# Altium PCB eTag.PcbDoc
Units mm, origin at the board's own origin, x right, y up, seen from the top; angles counter-clockwise.
Board outline 152.4 x 101.6 mm, 2 copper layers (Top Layer, Bottom Layer); 68 components, 72 nets, 192 pads, 5 vias.
Unrouted connection lines stored in the file: 122.
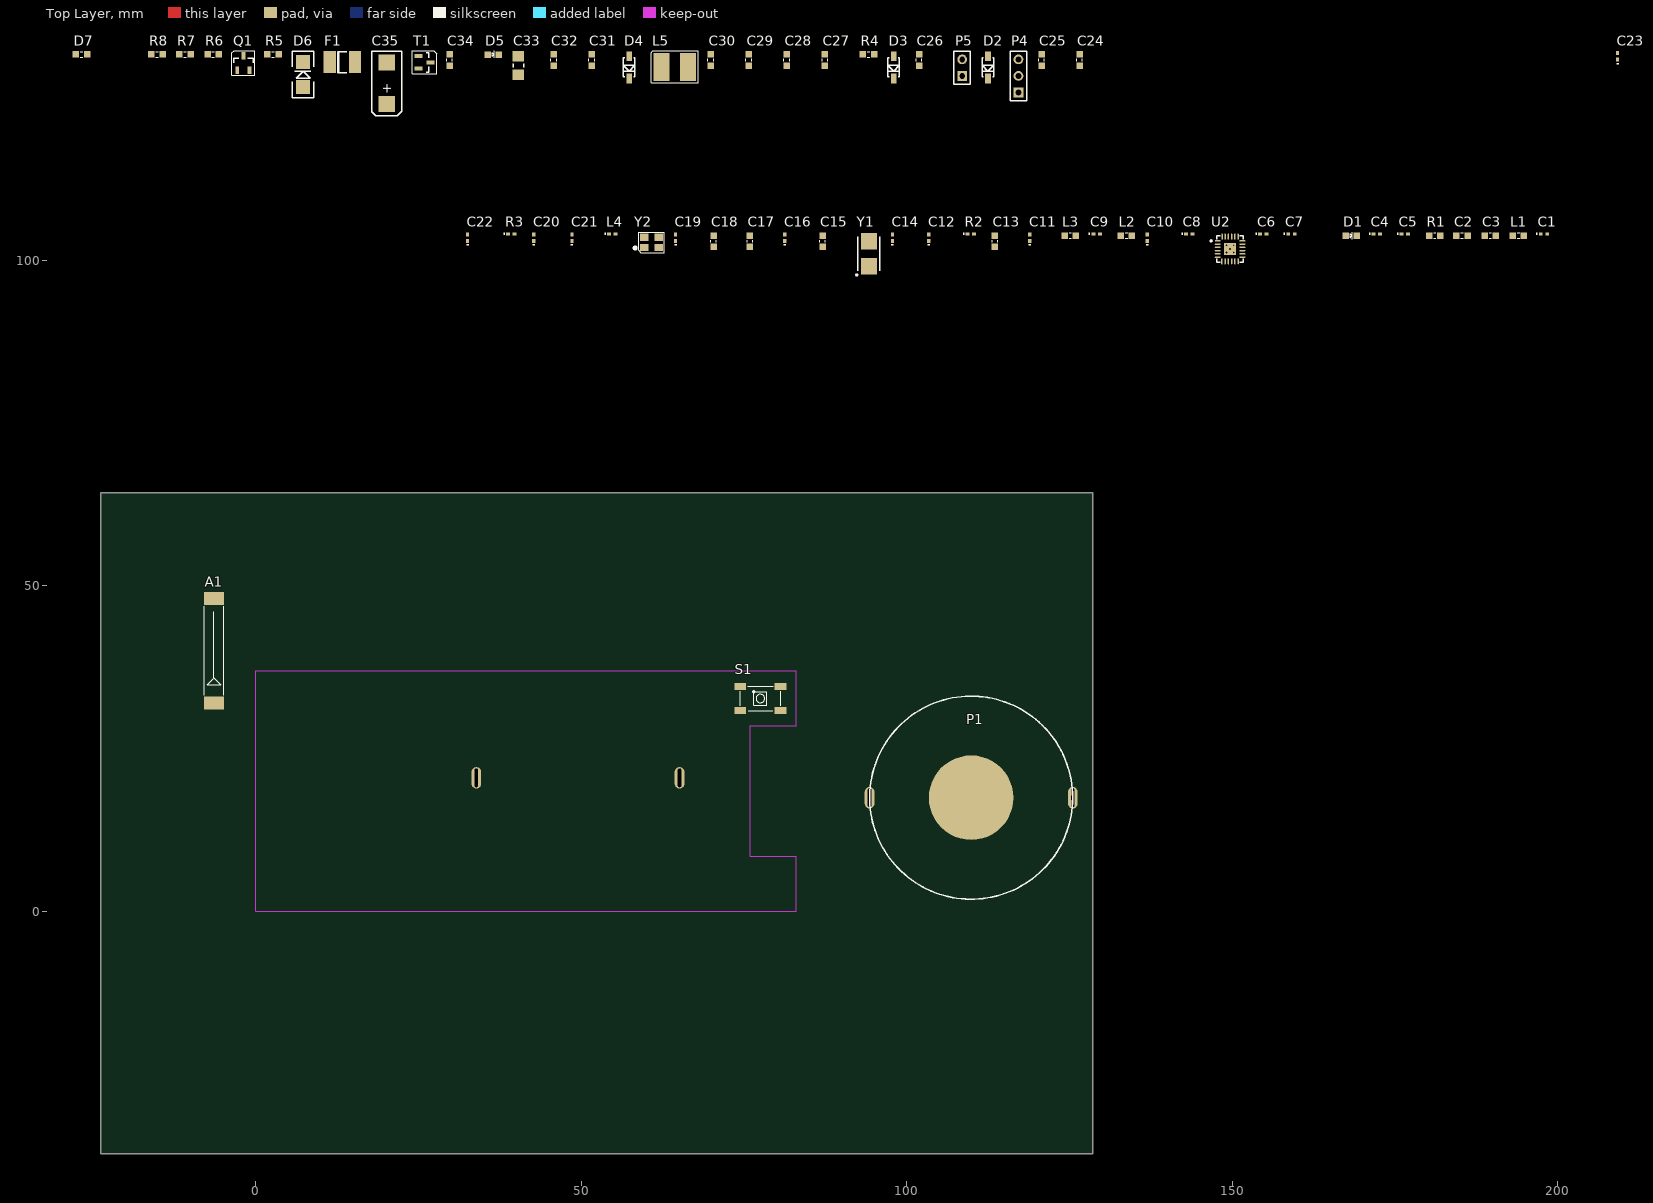
[diagram p0: Top Layer view]
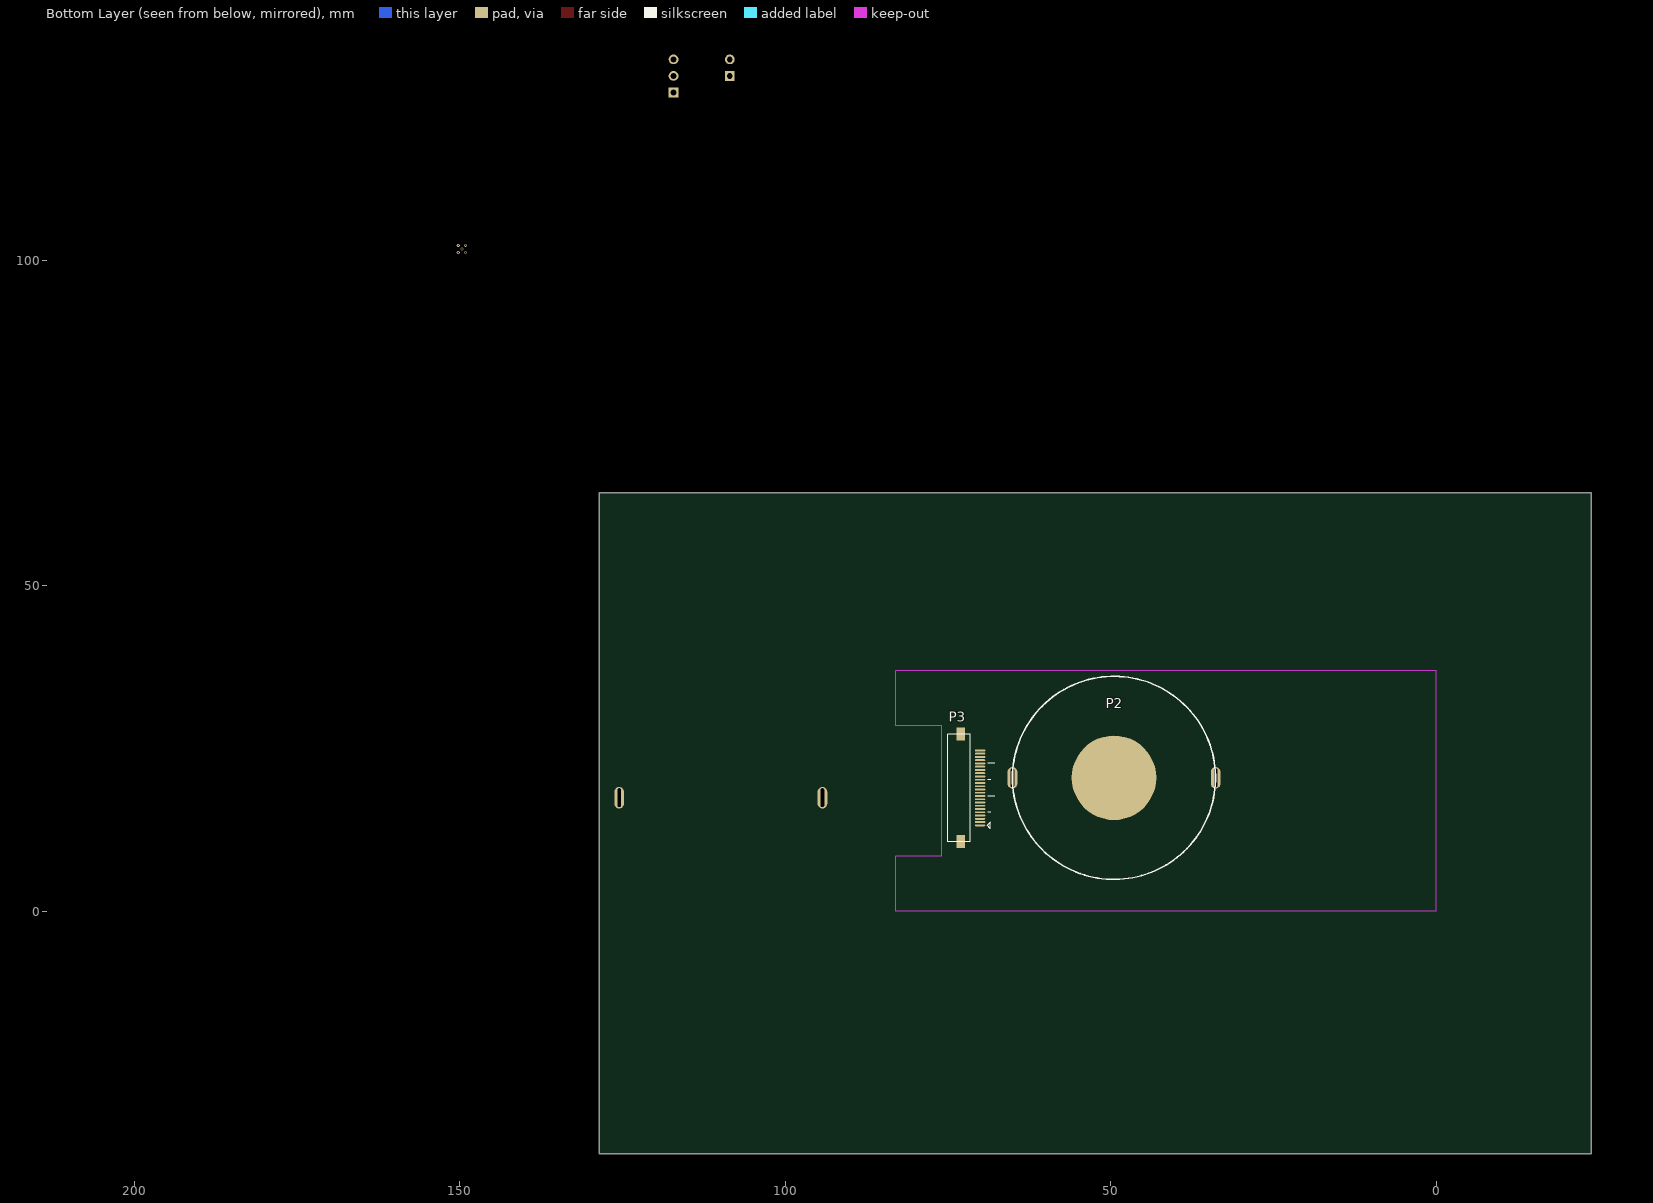
[diagram p1: Bottom Layer view, seen from below]

## Layer stack, top to bottom
Top Solder: solder mask 0.0102, Solder Resist, Dk 3.5
Top Layer: signal copper 0.0356
Dielectric1: dielectric 0.32, FR-4, Dk 4.8
Bottom Layer: signal copper 0.0356
Bottom Solder: solder mask 0.0102, Solder Resist, Dk 3.5

## Board outline
-23.851,-37.236 128.549,-37.236 128.549,64.364 -23.851,64.364

## Design rules (kind name [scope] priority, off if disabled: settings)
Clearance [All] p1 off: gap=0.305
ComponentClearance [All] p1 off: gap=0.254 collisioncheckmode=3 verticalgap=0.254 showdistances=FALSE
FabricationTestPointUsage TestPointUsage [All] p1: valid=0 allowmultiple=FALSE
FabricationTestpoint Testpoint [(IsPad And (OnTopLayer Or OnBottomLayer))] p1: side=3 testpointundercomponent=TRUE minsize=1.016 maxsize=2.54 preferedsize=1.524 minholesize=0 maxholesize=1.016 preferedholesize=0.813 testpointgrid=0.025 allowsidetop=TRUE allowsidebottom=TRUE usegrid=TRUE gridtolerance=0
HoleSize [All] p1: absolutevalues=TRUE maxlimit=5.08 minlimit=0.025 maxpercent=80.000 minpercent=20.000
PolygonConnect [All] p1: connectstyle=Relief reliefconductorwidth=0.381 reliefentries=4 polygonreliefangle="90 Angle" airgapwidth=0.254
RoutingVias [All] p1: holewidth=0.711 width=1.27 viastyle="Through Hole" minholewidth=0.254 minwidth=0.508 maxholewidth=5.08 maxwidth=7.62
SolderMaskExpansion [All] p1: expansion=0.102
Width [All] p1: maxlimit=5.08 minlimit=0.203 preferedwidth=0.305 minimp=50.000000 maximp=50.000000 favimp=50.000000
26 further rules are at their usual default settings.

## Components (designator, comment, footprint, x,y, rotation, side; value= is the part's Value field where it differs from the comment)
A1 "ANTA" ANTA-433 -6.452,48.057 r270 top
C1 "Cap" 0402-A 197.891,104.089 r0 top
C2 "Cap" 0603 185.293,103.835 r0 top
C3 "Cap" 0603 189.636,103.835 r0 top
C4 "Cap" 0402-A 172.212,104.089 r0 top
C5 "Cap" 0402-A 176.53,104.089 r0 top
C6 "Cap" 0402-A 154.788,104.089 r0 top
C7 "Cap" 0402-A 159.106,104.089 r0 top
C8 "Cap" 0402-A 143.383,104.089 r0 top
C9 "Cap" 0402-A 129.159,104.089 r0 top
C10 "Cap" 0402-A 136.931,103.53 r90 top
C11 "Cap" 0402-A 118.897,103.53 r90 top
C12 "Cap" 0402-A 103.378,103.53 r90 top
C13 "Cap" 0603 113.538,102.972 r90 top
C14 "Cap" 0402-A 97.79,103.53 r90 top
C15 "Cap" 0603 87.071,102.972 r90 top
C16 "Cap" 0402-A 81.229,103.53 r90 top
C17 "Cap" 0603 75.895,102.972 r90 top
C18 "Cap" 0603 70.307,102.972 r90 top
C19 "Cap" 0402-A 64.465,103.53 r90 top
C20 "Cap" 0402-A 42.672,103.53 r90 top
C21 "Cap" 0402-A 48.539,103.53 r90 top
C22 "Cap" 0402-A 32.512,103.53 r90 top
C23 "Cap" 0402-A 209.194,131.369 r90 top
C24 "Cap" 0603 126.543,130.81 r90 top
C25 "Cap" 0603 120.701,130.81 r90 top
C26 "Cap" 0603 101.879,130.81 r90 top
C27 "Cap" 0603 87.401,130.81 r90 top
C28 "Cap" 0603 81.559,130.81 r90 top
C29 "Cap" 0603 75.717,130.81 r90 top
C30 "Cap" 0603 69.875,130.81 r90 top
C31 "Cap" 0603 51.587,130.81 r90 top
C32 "Cap" 0603 45.745,130.81 r90 top
C33 "Cap" 3216[1206] 40.31,129.972 r90 top
C34 "Cap" 0603 29.743,130.81 r90 top
C35 "Cap Pol3" C7343 20.091,127.229 r90 top
D1 "TEST" 0603-LED 168.275,103.81 r0 top
D2 "MBR0503" SOD-123 112.471,131.394 r0 top
D3 "MBR0503" SOD-123 97.968,131.394 r0 top
D4 "MBR0503" SOD-123 57.328,131.394 r0 top
D5 "WORK" 0603-LED 36.449,131.648 r0 top
D6 "SS54" SMA 7.239,128.6 r90 top
D7 "RL0603E012M100K" 0603 -26.822,131.674 r0 top
F1 "Fuse Thermal" 1812 13.259,130.48 r0 top
L1 "Inductor" 0603 193.954,103.835 r0 top
L2 "Inductor" 0603 133.731,103.835 r0 top
L3 "Inductor" 0603 125.095,103.835 r0 top
L4 "Inductor" 0402-A 54.737,104.089 r0 top
L5 "Inductor" L-CD43 64.338,129.769 r0 top
P1 "CR3032" CR3032 109.88,17.475 r180 top
P2 "CR3032" CR3032 49.479,20.523 r0 bottom
P3 "Header 24" FPC-24 70.053,13.233 r270 bottom
P4 "Header 3" HDR1X3 117.145,125.832 r90 top
P5 "Header 2" HDR1X2 108.509,128.372 r90 top
Q1 "NPN" SOT-23-NPN -1.93,130.353 r0 top
R1 "Res1" 0603 181.102,103.835 r0 top
R2 "Res1" 0402-A 109.83,104.089 r0 top
R3 "Res1" 0402-A 39.218,104.089 r0 top
R4 "Res1" 0603 94.107,131.674 r0 top
R5 "Res1" 0603 2.616,131.674 r0 top
R6 "Res1" 0603 -6.579,131.674 r0 top
R7 "Res1" 0603 -10.897,131.674 r0 top
R8 "Res1" 0603 -15.215,131.674 r0 top
S1 "SW-PB" SW1 77.495,32.715 r0 top
T1 "Si1304" SOT-23-NMOS 25.883,130.454 r0 top
U2 "A7139" QFN24N 149.657,101.778 r0 top
Y1 "XTAL" XT5032 94.158,101.041 r90 top
Y2 "12.8M" XT3225 59.665,103.581 r0 top

## Footprints (in the part's own frame and the unit in brackets; to place one, negate y for a bottom-side part, rotate by r counter-clockwise, add the part's x,y. Pads: shape width x height; smd on the part's side, far side on the other; paste and mask are expansions set on the pad)
0402-A [mm] "Chip Inductor; Body 1 x 0.5 mm (LxW typ)"
  rect 0.6x0.5 smd: 1(-0.5,0) 2(0.5,0)
  silkscreen extent -1.1,-0.15 -1.1,0.15
0603 [mm]
  rect 1x1 smd: 1(-0.864,0) 2(0.864,0)
  silkscreen extent -0.18,-0.43 0.18,0.43
0603-LED [mm]
  rect 1x1 smd: 1(-0.864,0) 2(0.864,0)
  silkscreen extent -0.18,-0.51 0.18,0.56
1812 [mm] "Chip Capacitor; Body 4.5 x 3.2 mm (LxW typ)"
  rect 1.9x3.4 smd: 1(-1.95,0) 2(1.95,0)
  silkscreen extent -0.7,-1.6 0.7,1.6
3216[1206] [mm] "Chip Resistor; Body 3.2 x 1.6 mm (LxW typ)"
  rect 1.6x1.8 smd: 1(-1.4,0) 2(1.4,0)
  silkscreen extent -0.3,-0.8 0.3,0.8
ANTA-433 [mm]
  rect 2x3.1 smd: 1(0,0) 2(16,0)
  silkscreen extent 1.14,-1.52 14.86,1.52
C7343 [mm] "Molded Capacitor, 2-Leads, Body 7.3x4.3mm, IPC Medium Density"
  rect 2.45x2.5 smd: 1(-3.2,0) 2(3.2,0)
  silkscreen extent -4.95,-2.29 4.95,2.29, body extent -3.75,-2.25 3.75,2.25, height 4.3
CR3032 [mm]
  oval 1.5x3.3 hole 0.5 slot 2.85 at 90 deg: 1(-15.621,0) 1(15.6,0)
  round 13 smd: 2(0,0)
  silkscreen extent -15.6,-15.6 15.6,15.6
FPC-24 [mm]
  rect 2x1.3 smd: 0(-14,-3) 0(2.5,-3)
  oval 0.3x1.6 smd: 1(0,0) 2(-0.5,0) 3(-1,0) 4(-1.5,0) 5(-2,0) 6(-2.5,0) 7(-3,0) 8(-3.5,0) 9(-4,0) 10(-4.5,0) 11(-5,0) 12(-5.5,0) 13(-6,0) 14(-6.5,0) 15(-7,0) 16(-7.5,0) 17(-8,0) 18(-8.5,0) 19(-9,0) 20(-9.5,0) 21(-10,0) 22(-10.5,0) 23(-11,0) 24(-11.5,0)
  silkscreen extent -14,-5 2.5,2.23
HDR1X2 [mm] "Connector; Header; 2 Position"
  rect 1.5x1.5 hole 0.9: 1(0,0)
  round 1.5 hole 0.9: 2(2.54,0)
  silkscreen extent -1.27,-1.27 3.81,1.27
HDR1X3 [mm] "Connector; Header; 3 Position"
  rect 1.5x1.5 hole 0.9: 1(0,0)
  round 1.5 hole 0.9: 2(2.54,0) 3(5.08,0)
  silkscreen extent -1.27,-1.27 6.35,1.27
L-CD43 [mm]
  rect 2.5x4.3 smd: 1(-2.032,0) 2(2.032,0)
  silkscreen extent -3.61,-2.44 3.58,2.44
QFN24N [mm] "QFN, 24-Leads, Body 4.1x4.1mm (max), Pitch 0.50mm, IPC Medium Density"
  oval 0.889x0.25 smd: 1(-1.905,1.25) 2(-1.905,0.75) 3(-1.905,0.25) 4(-1.905,-0.25) 5(-1.905,-0.75) 6(-1.905,-1.25) 13(1.905,-1.25) 14(1.905,-0.75) 15(1.905,-0.25) 16(1.905,0.25) 17(1.905,0.75) 18(1.905,1.25)
  oval 0.25x0.889 smd: 7(-1.25,-1.905) 8(-0.75,-1.905) 9(-0.25,-1.905) 10(0.25,-1.905) 11(0.75,-1.905) 12(1.25,-1.905) 19(1.25,1.905) 20(0.75,1.905) 21(0.25,1.905) 22(-0.25,1.905) 23(-0.75,1.905) 24(-1.219,1.905)
  rect 1.8x1.8 smd: 25(0,0)
  silkscreen extent -3.02,-2.05 2.05,2.05, body extent -2.05,-2.05 2.05,2.05, height 0.8
SMA [mm] "Molded Diode, 2-Leads, Body 4.3x2.7mm, IPC Medium Density"
  rect 2.15x2.15 smd: 1(-1.93,0) 2(1.93,0)
  silkscreen extent -3.56,-1.65 3.56,1.65, body extent -2.28,-1.42 2.29,1.42, height 2.95
SOD-123 [mm]
  rect 0.85x1.524 smd: 1(0,0) 2(0,-3.4)
  silkscreen extent -0.9,-3.15 0.9,-0.25
SOT-23-NMOS [mm] "SOT23, 3-Leads, Body 3.0x2.6mm (max), Pitch 0.95mm, IPC Medium Density"
  rect 1.25x0.6 smd: 1(-0.925,0.95) 2(0.925,0) 3(-0.925,-0.95)
  silkscreen extent -1.91,-1.78 1.91,1.78, body extent -0.7,-1.5 0.7,1.5, height 1.1
SOT-23-NPN [mm]
  rect 0.6x1.143 smd: 1(0.95,-1.108) 2(-0.95,-1.108) 3(0,1.108)
  silkscreen extent -1.75,-1.89 1.75,1.87, body extent -1.5,-0.66 1.5,0.74, height 1.1
SW1 [mm]
  rect 1.8x1.1 smd: 1(-3.1,1.85) 2(-3.1,-1.85) 3(3.1,-1.85) 4(3.1,1.85)
  silkscreen extent -3.1,-1.85 3.1,1.85
XT3225 [mm]
  rect 1.3x1.1 smd: 1(0,-1.6) 2(2.2,-1.6) 3(2.2,0) 4(0,0)
  silkscreen extent -1.6,-2.39 3.1,0.76
XT5032 [mm]
  rect 2.5x2.45 smd: 1(-1.925,0) 2(1.925,0)
  silkscreen extent -3.37,-1.7 2.6,1.97, body extent -2.58,-1.68 2.58,1.67, height 1.6

## Part data
A1: library part SMB, "SMB Straight Connector"
C1 C2 C3 C4 C5 C6 C7 C8 C9 C10 C11 C12 C13 C14 C15 C16 C17 C18 C19 C20 C21 C22 C23 C24 C25 C26 C27 C28 C29 C30 C31 C32 C33 C34: "Capacitor"
C35: "Polarized Capacitor (Surface Mount)"
D1 D5: library part LED2, "Typical RED, GREEN, YELLOW, AMBER GaAs LED"
D2 D3 D4 D6: library part "Diode 1N5408", "3 Amp Medium Power Silicon Rectifier Diode"
D7: library part "Diode 18TQ045", "Schottky Rectifier"
F1: "Thermal Fuse"
P1 P2: library part "Header 2", "Header, 2-Pin"
P3: "Header, 24-Pin"
P4: "Header, 3-Pin"
P5: "Header, 2-Pin"
Q1: library part 2N5551, "NPN General Purpose Amplifier"
R1 R2 R3 R4 R5 R6 R7 R8: "Resistor"
S1: "Switch"
T1: library part IRF644S, "HEXFET N-Channel Power MOSFET"
Y1: "Crystal Oscillator"
Y2: library part 3225-wy

## Via types
v1: diameter 0.508, hole 0.254, Top Layer to Bottom Layer, tented top, 5 vias

## Nets (pads, with @x,y where several pads share a name; then routed paths per layer and width w, separated by ;. In a path a pad name is that pad's centre, name@x,y a point inside that pad or via, vN(x,y) a via of type N, cw(c..) or ccw(c..) an arc to the next point about the centre after c; other vN are vias at no path point)
+3V: C2.1 C3.1 C11.2 C12.2 C15.1 C33.1 L3.2 L5.1 P3.15 P3.16 R4.1 R7.1 U2.22
+4.2V: C35.1 D6.2
ALT_116: 
D1: R1.1
DOG: 
E_BUSY: P3.9
E_CLK: P3.13 P4.3
E_CS: P3.12
E_D/C: P3.11
E_RES: P3.10
E_SDI: P3.14 P4.1
GDR: P3.2 R5.1 T1.1
GIO1: U2.19
GIO2: U2.20
GND: C1.2 C2.2 C3.2 C4.2 C5.2 C8.2 C10.2 C11.1 C12.1 C13.2 C14.1 C15.2 C16.2 C17.2 C18.2 C19.1 C20.1 C21.1 C22.1 C23.2 C24.1 C25.1 C26.1 C27.1 C29.1 C30.1 C31.1 C32.1 C33.2 C34.1 C35.2 D1.2 D3.2 D7.2 L1.2 P1.2 P2.2 P3.8 P3.17 P5.2 Q1.1 R5.2 R6.2 S1.1 U2.2 U2.13 U2.25
  other v1: 149.107,101.228 150.207,101.228 149.657,101.778 149.107,102.328 150.207,102.328
GSM_PW: 
GSM_RST: 
GSM_RX: 
GSM_TX: 
HLT_CTL: P3.1
MISO: P4.2
NetA1_1: A1.1 C6.2 C9.2
NetC4_1: C4.1 U2.1
NetC5_1: C5.1 U2.24
NetC6_1: C6.1 C7.2 L1.1
NetC7_1: C7.1 U2.3
NetC8_1: C8.1 L2.1 L3.1 U2.4
NetC9_1: C9.1 L2.2
NetC10_1: C10.1 U2.17 U2.18
NetC13_1: C13.1 Y1.2
NetC14_2: C14.2 R2.2
NetC17_1: C17.1 Y1.1
NetC18_1: C18.1
NetC20_2: C20.2 U2.11 Y2.1
NetC21_2: C21.2 U2.12 Y2.3
NetC22_2: C22.2 R3.2 U2.9
NetC23_1: C23.1 R3.1
NetC26_2: C26.2 P3.18
NetC28_1: C28.1 D4.1 L5.2 T1.2
NetC28_2: C28.2 D2.2 D3.1
NetD1_1: D1.1 R1.2
NetD5_1: D5.1 R4.2
NetD5_2: D5.2 Q1.3
NetD6_1: D6.1 F1.2
NetD7_1: D7.1 R7.2 R8.1 S1.2
NetL4_1: L4.1 U2.7
NetL4_2: L4.2 U2.8
NetR2_1: R2.1 U2.5
PREVGH: C30.2 D4.2 P3.21
PREVGL: C32.2 D2.1 P3.23
RESE: P3.3 R6.1 T1.3
RST: P5.1
SCK_116: 
SCK_7139: U2.15
SCS_7139: U2.14
SDA_116: 
SDA_7139: U2.16
STAT: 
SW1: R8.2
TSCL: P3.6
TSDA: P3.7
VCC: P1.1 P2.1
VCOM: C34.2 P3.24
VDA: C1.1 C16.1 C19.2 U2.6 U2.10 U2.23
VGH: C25.2 P3.5
VGL: C24.2 P3.4
VIN: F1.1
VPP: C27.2 P3.19
VSA: 
VSH: C29.2 P3.20
VSL: C31.2 P3.22
WORK_LED: Q1.2
pads on no net: A1.2 P3.0 S1.3 S1.4 U2.21 Y2.2 Y2.4

## Keep-outs
Keep-Out Layer:
  lines w0.178: 0,37 0,0 83,0 83,8.5 75.946,8.5 75.946,28.5 83,28.5 83,37.008 0,37.008

## Text inside footprints (layer, text, board x,y; h text height)
C35: Top Overlay "+" at 20.803,125.578 h1.5 r90